# Altium PCB ECE453_PWR.PcbDoc
Units mil, origin at the board's own origin, x right, y up, seen from the top; angles counter-clockwise.
Board outline 1800 x 3200 mil, 2 copper layers (Top Layer, Bottom Layer); 8 components, 5 nets, 38 pads, 0 vias.
Unrouted connection lines stored in the file: 30.
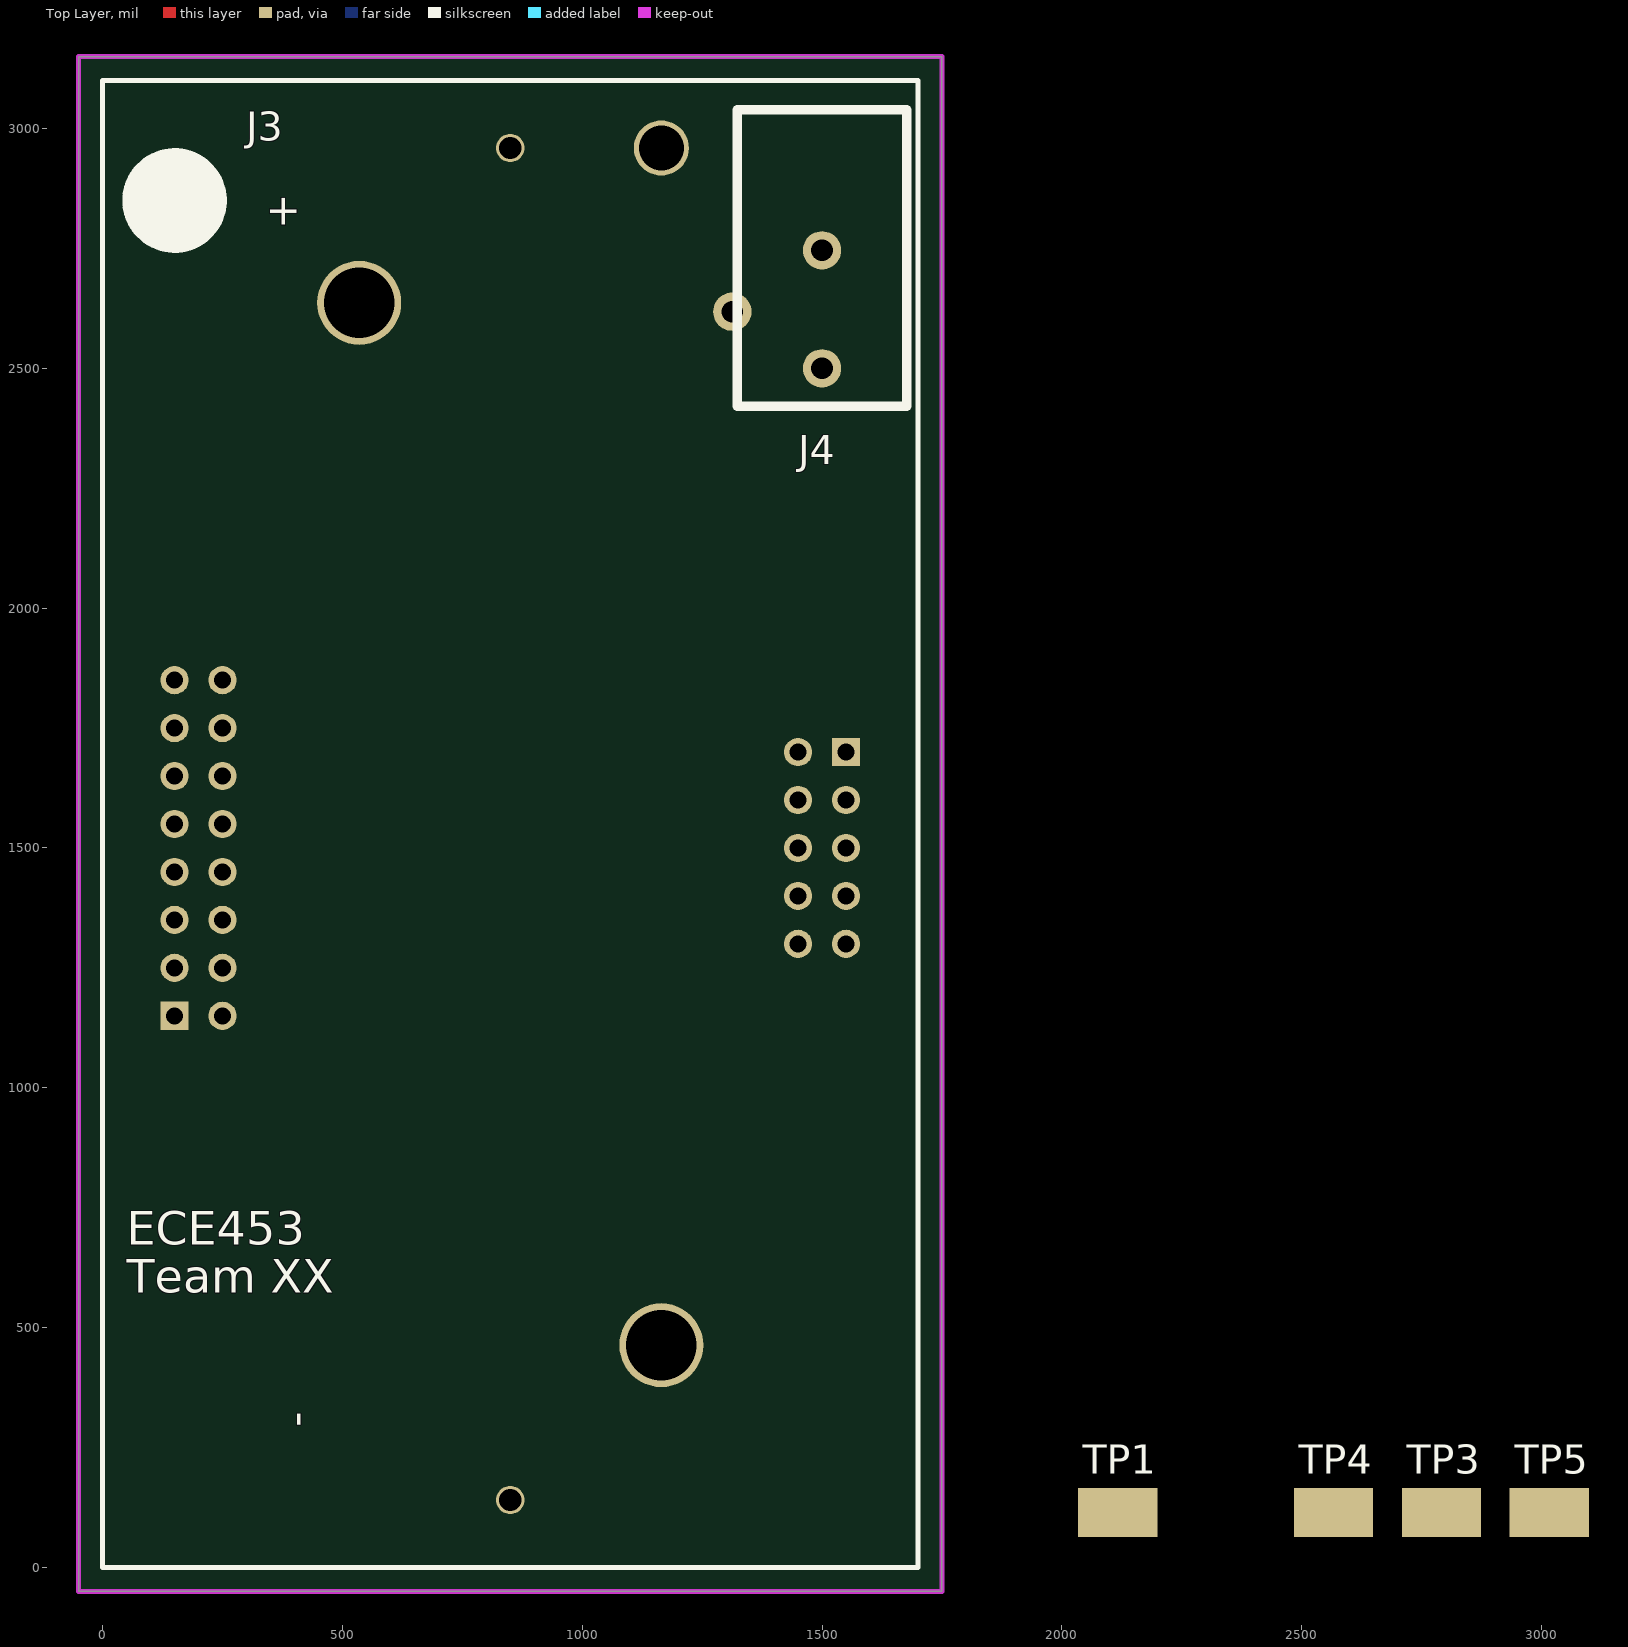
[diagram p0: Top Layer view]
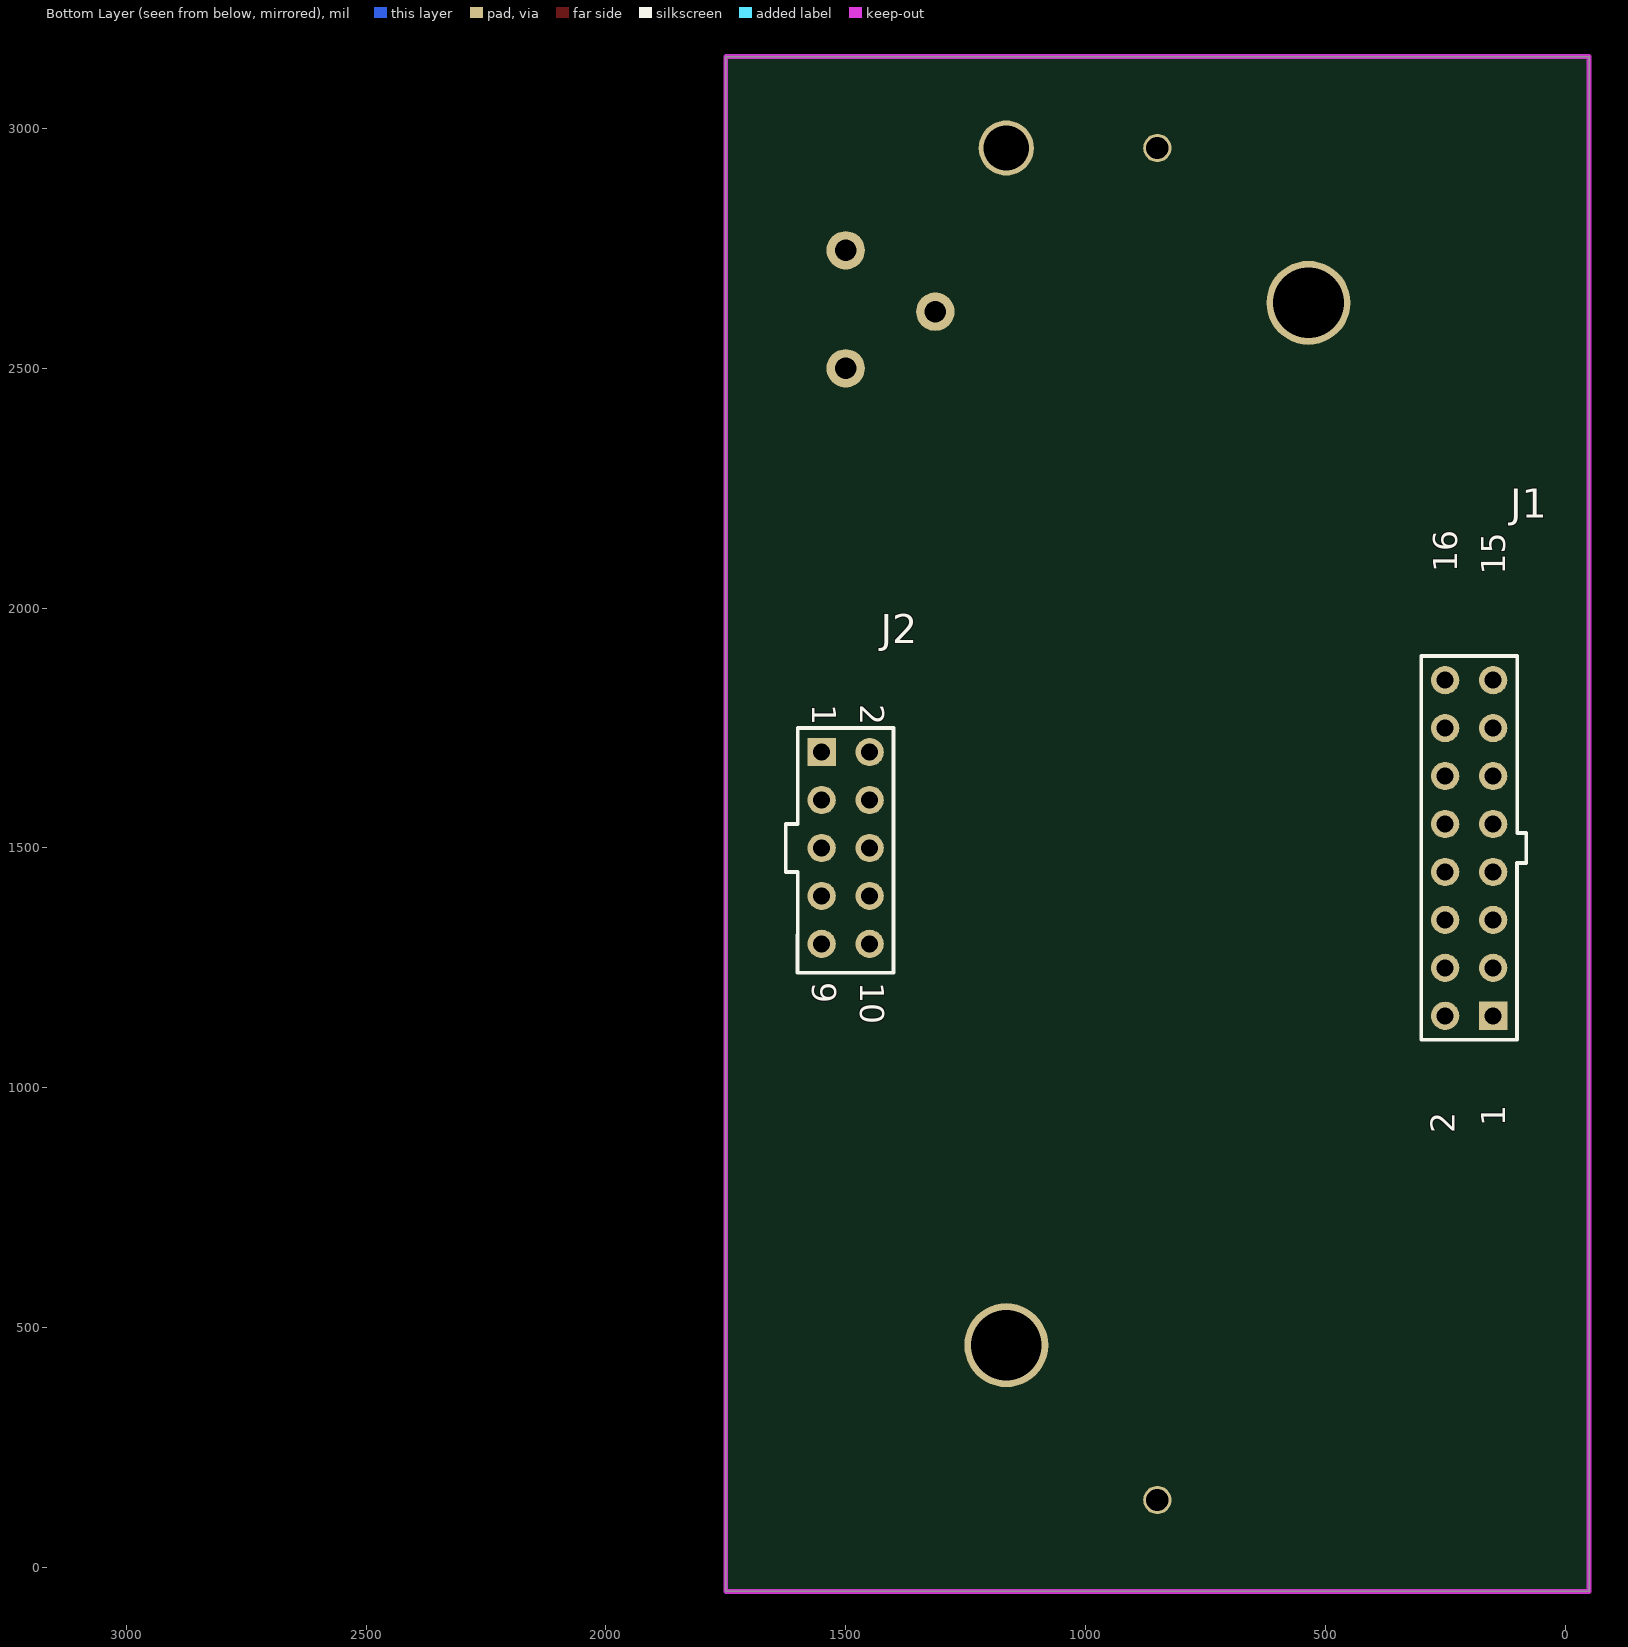
[diagram p1: Bottom Layer view, seen from below]

## Layer stack, top to bottom
Top Solder: solder mask 0.4, Solder Resist, Dk 3.5
Top Layer: signal copper 1.4
Dielectric1: dielectric 12.6, FR-4, Dk 4.8
Bottom Layer: signal copper 1.4
Bottom Solder: solder mask 0.4, Solder Resist, Dk 3.5

## Board outline
-50,-50 1750,-50 1750,3150 -50,3150

## Design rules (kind name [scope] priority, off if disabled: settings)
Clearance Polygon_Clearance [All vs InPolygon] p1: gap=20 ignorepadtopadclearanceinfootprint=FALSE except(0: Arc-Hole Track-Hole SMDPad-Hole THPad-Hole Via-Hole Fill-Hole Poly-Hole Region-Hole Text-Hole)
Clearance [All] p2: gap=7.87 ignorepadtopadclearanceinfootprint=FALSE except(0: Arc-Hole Track-Hole SMDPad-Hole THPad-Hole Via-Hole Fill-Hole Poly-Hole Region-Hole Text-Hole)
ComponentClearance [InComponent('U3')] p1: gap=0 collisioncheckmode=3 verticalgap=10 showdistances=FALSE
Height [All] p1: minheight=0 maxheight=866.14 prefheight=500
HoleSize [All] p1: absolutevalues=TRUE maxlimit=250 minlimit=1.18 maxpercent=80.000 minpercent=20.000
MinimumSolderMaskSliver [All] p1: minsoldermaskwidth=7
NetAntennae NetAntennae_5.0V [InNet('5.0V')] p1: netantennaetolerance=0
NetAntennae NetAntennae_3.3V [InNet('3.3V')] p2: netantennaetolerance=0
PolygonConnect [IsNamedPolygon('5.0V_L01_P047') vs IsVia] p1: connectstyle=Relief reliefconductorwidth=10 reliefentries=4 polygonreliefangle="90 Angle" airgapwidth=10
PolygonConnect PolygonConnect_1 [All] p2: connectstyle=Relief reliefconductorwidth=10 reliefentries=4 polygonreliefangle="90 Angle" airgapwidth=10
RoutingVias [All] p1: holewidth=28 width=50 viastyle="Through Hole" minholewidth=15 minwidth=25 maxholewidth=28 maxwidth=50
SilkToSolderMaskClearance [IsPad] p1: minsilkscreentomaskgap=6 clearancetoexposedcopper=TRUE
SolderMaskExpansion [All] p1: expansion=4
Width [All] p1: maxlimit=472.44 minlimit=3.94 preferedwidth=10 minimp=50.000000 maximp=50.000000 favimp=50.000000
24 further rules are at their usual default settings.

## Components (designator, comment, footprint, x,y, rotation, side; value= is the part's Value field where it differs from the comment)
J1 "CONN_HEADER_MALE_8x2" SBH11-PBPC-D08-ST-BK 200,1500 r90 bottom
J2 "CONN_HEADER_MALE_5x2" SBH11-PBPC-D05-ST-BK 1500,1500 r270 bottom
J3 "CONN_BAT_18650" 1043 850,1550 r90 top
J4 "PWR2.5" PJ-102 1500,2500 r0 top
TP1 "TP_1206" TP-SMC-1206 2116.54,114.17 r0 top
TP3 "TP_1206" TP-SMC-1206 2791.54,114.17 r0 top
TP4 "TP_1206" TP-SMC-1206 2566.54,114.17 r0 top
TP5 "TP_1206" TP-SMC-1206 3016.54,114.17 r0 top

## Footprints (in the part's own frame and the unit in brackets; to place one, negate y for a bottom-side part, rotate by r counter-clockwise, add the part's x,y. Pads: shape width x height; smd on the part's side, far side on the other; paste and mask are expansions set on the pad)
1043 [mm] "18650 Battery Holder"
  round 1.5 hole 1.19: 1(35.8,0) 2(-35.8,0)
  round 4.445 hole 3.75: MH1(27.6,8) MH2(-27.6,-8)
  round 2.921 hole 2.39: MH3(35.8,-8)
  body extent -38.53,-10.32 38.53,10.33, height 14.86
PJ-102 [mil] "Power Jack w/switch small pins"
  round 80 hole 45: 1(0,0) 2(0,246.05) 3(-187,118.1)
  silkscreen extent -177,-79 177,539, body extent -190,-20 180,547, height 435
SBH11-PBPC-D05-ST-BK [mm] "Connector; Header; 5x2 Position"
  rect 1.5x1.5 hole 0.9: 1(-5.08,-1.27)
  round 1.5 hole 0.9: 2(-5.08,1.27) 3(-2.54,-1.27) 4(-2.54,1.27) 5(0,-1.27) 6(0,1.27) 7(2.54,-1.27) 8(2.54,1.27) 9(5.08,-1.27) 10(5.08,1.27)
  silkscreen extent -6.35,-3.18 6.6,2.54, body extent -10.1,-4.45 10.1,4.65, height 8.95
SBH11-PBPC-D08-ST-BK [mm] "Connector; Header; 8x2 Position"
  rect 1.5x1.5 hole 0.9: 1(-8.89,-1.27)
  round 1.5 hole 0.9: 2(-8.89,1.27) 3(-6.35,-1.27) 4(-6.35,1.27) 5(-3.81,-1.27) 6(-3.81,1.27) 7(-1.27,-1.27) 8(-1.27,1.27) 9(1.27,-1.27) 10(1.27,1.27) 11(3.81,-1.27) 12(3.81,1.27) 13(6.35,-1.27) 14(6.35,1.27) 15(8.89,-1.27) 16(8.89,1.27)
  silkscreen extent -10.16,-3.03 10.17,2.54, body extent -13.85,-4.47 13.97,4.63, height 9.3
TP-SMC-1206 [mm] "Surface mount test point 1206"
  rect 4.2x2.6 smd mask+0: 1(0,0)
  body extent -1.57,-0.79 1.63,0.81, height 1.22

## Part data
J1: "CONN HEADER 2.54MM 16POS GOLD", Color=Black, Manufacturer="Sullins Connector Solutions", Manufacturer Part Number=SBH11-PBPC-D08-ST-BK, Supplier Part Number 1=S9171-ND, Category="Connectors, Interconnects", ComponentLink1Description=http://sullinscorp.com/catalogs/145_PAGE118_.100_SBH11_SERIES_MALE_BOX_HDR_ST_RA_SMT.pdf, ComponentLink1URL=http://sullinscorp.com/catalogs/145_PAGE118_.100_SBH11_SERIES_MALE_BOX_HDR_ST_RA_SMT.pdf, Connector Type="Header, Shrouded", Contact Finish=Gold, Contact Finish Thickness=Flash, Contact Mating Length=-, Contact Type="Male Pin", Fastening Type=-, Features="Polarizing Key", Mounting Type="Through Hole", Number of Positions=16, Number of Positions Loaded=All, Number of Rows=2, Packaging=Tray, Part Status=Active, Pitch="0.100\" (2.54mm)", Pricing 1="1=0.55, 10=0.428, 25=0.3988, 50=0.3626, 100=0.3263, 250=0.27552, 500=0.261, 1000=0.232, 2500=0.19285 (USD)", RoHS="RoHS Compliant", Row Spacing="0.100\" (2.54mm)", Stock 1=13784, Supplier 1=Digi-Key, Termination=Solder
J2: "CONN HEADER 2.54MM 10POS GOLD", Color=Black, Manufacturer="Sullins Connector Solutions", Manufacturer Part Number=SBH11-PBPC-D05-ST-BK, Supplier Part Number 1=S9169-ND, Category="Connectors, Interconnects", ComponentLink1Description=http://sullinscorp.com/catalogs/145_PAGE118_.100_SBH11_SERIES_MALE_BOX_HDR_ST_RA_SMT.pdf, ComponentLink1URL=http://sullinscorp.com/catalogs/145_PAGE118_.100_SBH11_SERIES_MALE_BOX_HDR_ST_RA_SMT.pdf, Connector Type="Header, Shrouded", Contact Finish=Gold, Contact Finish Thickness=Flash, Contact Mating Length=-, Contact Type="Male Pin", Fastening Type=-, Features="Polarizing Key", Mounting Type="Through Hole", Number of Positions=10, Number of Positions Loaded=All, Number of Rows=2, Packaging=Tray, Part Status=Active, Pitch="0.100\" (2.54mm)", Pricing 1="1=0.64, 10=0.445, 25=0.3812, 50=0.343, 100=0.2985, 250=0.254, 500=0.2413, 1000=0.2159, 2500=0.17145 (USD)", RoHS="RoHS Compliant", Row Spacing="0.100\" (2.54mm)", Stock 1=29227, Supplier 1=Digi-Key, Termination=Solder
J3: "HOLDER FOR 18650 BATTERY"
J4: "Low Voltage Power Supply Connector", Colour=Black, Current Rating=2.5A, Flammability Rating="UL94 V-0", Insulation Resistance=50MR, Manufacturer=CUI, Manufacturer Part Number=PJ-102A, Max Operating Temperature=85°C, Min Operating Temperature=-25°C, Package Quantity=280, Supplier Part Number 1=CP-102A-ND, Voltage Rating=24V, ComponentLink1Description="Manufacturer Link", ComponentLink1URL=http://domino.kycon.com/internet/Products.html, ComponentLink2Description=http://www.cui.com/Product/Resource/FuturePDF/PJ-102A.pdf, ComponentLink2URL=http://www.cui.com/Product/Resource/FuturePDF/PJ-102A.pdf, ComponentLink3Description=http://www.mouser.com/ds/2/670/PJ-102A-524195.pdf, ComponentLink3URL=http://www.mouser.com/ds/2/670/PJ-102A-524195.pdf, ComponentLink4Description=https://www.cui.com/product/resource/digikeypdf/pj-102a.pdf, ComponentLink4URL=https://www.cui.com/product/resource/digikeypdf/pj-102a.pdf, Connector Type=Jack, Contact Gender=Male, Contact Material=Copper, Contact Plating=Nickel, DatasheetDocument=09-May-2002, Diameter=2.1mm, Gender=Male, Housing Colour=Black, Housing Material=Thermoplastic, Lead Free="Lead Free", Mount="Through Hole", Number of Conductors=2, Orientation=Horizontal, Packaging=Bulk, Pricing 1="1=0.64, 10=0.6, 25=0.54, 50=0.48, 100=0.46, 250=0.42, 500=0.4, 1000=0.33, 2500=0.3 (USD)", Published=17-Dec-2003, Publisher="Altium Limited", Shielding=Unshielded, Stock 1=20997, Supplier 1=Digi-Key, Termination="Through Hole"
TP1 TP3 TP4 TP5: "Test Point SMD 1206", Supplier Part Number 1=A106143CT-ND, Supplier 1=Digi-Key

## Nets (pads, with @x,y where several pads share a name; then routed paths per layer and width w, separated by ;. In a path a pad name is that pad's centre, name@x,y a point inside that pad or via, vN(x,y) a via of type N, cw(c..) or ccw(c..) an arc to the next point about the centre after c; other vN are vias at no path point)
3.3V: J1.2 J1.4 J1.6 J1.8 J1.10 J1.12 J1.14 J1.16
5.0V: J2.2 J2.4 J2.6 J2.8 J2.10 J4.1 TP5.1
GND: J1.1 J1.3 J1.5 J1.7 J1.9 J1.11 J1.13 J1.15 J2.1 J2.3 J2.5 J2.7 J2.9 J4.2 J4.3 TP1.1
V_BATT: J3.1 TP3.1
V_BATT_NEG: J3.2 TP4.1
pads on no net: J3.MH1 J3.MH2 J3.MH3

## Polygon pours and split planes (outlines as drawn)
GND on Top Layer "Top Layer-GND" (solid, pour order 24): 1721.65,2902.76
3.3V on Top Layer "Top Layer-3.3V_MEZZ 1" (solid, pour order 16): 410.83,2637.64

## Keep-outs
Keep-Out Layer:
  the board outline again, w10

## Silkscreen, mask and mechanical layers (free items; w line width, h text height)
Top Overlay:
  circle w118.11: c150,2850 r50
  lines w10: 0,0 0,3100 1550,3100 1600,3100 1700,3100 1700,3000 1700,0 0,0
  text "ECE453" at 50,650 h120
  text "Team XX" at 50,550 h120
Mechanical 9:
  the board outline again, w10

## Text inside footprints (layer, text, board x,y; h text height)
J1: Bottom Overlay "16" at 225,2075 h50 r270; Bottom Overlay "15" at 125,2070 h50 r270; Bottom Overlay "1" at 125,920 h50 r270; Bottom Overlay "2" at 230,905 h50 r270
J2: Bottom Overlay "10" at 1470,1220 h50 r90; Bottom Overlay "9" at 1570,1220 h50 r90; Bottom Overlay "1" at 1570,1800 h50 r90; Bottom Overlay "2" at 1470,1800 h50 r90
J3: Top Overlay "-" at 385,325 h65 r270; Top Overlay "+" at 405,2790 h65 r90